# EAGLE board cdciom8print (EAGLE 7.7.0)
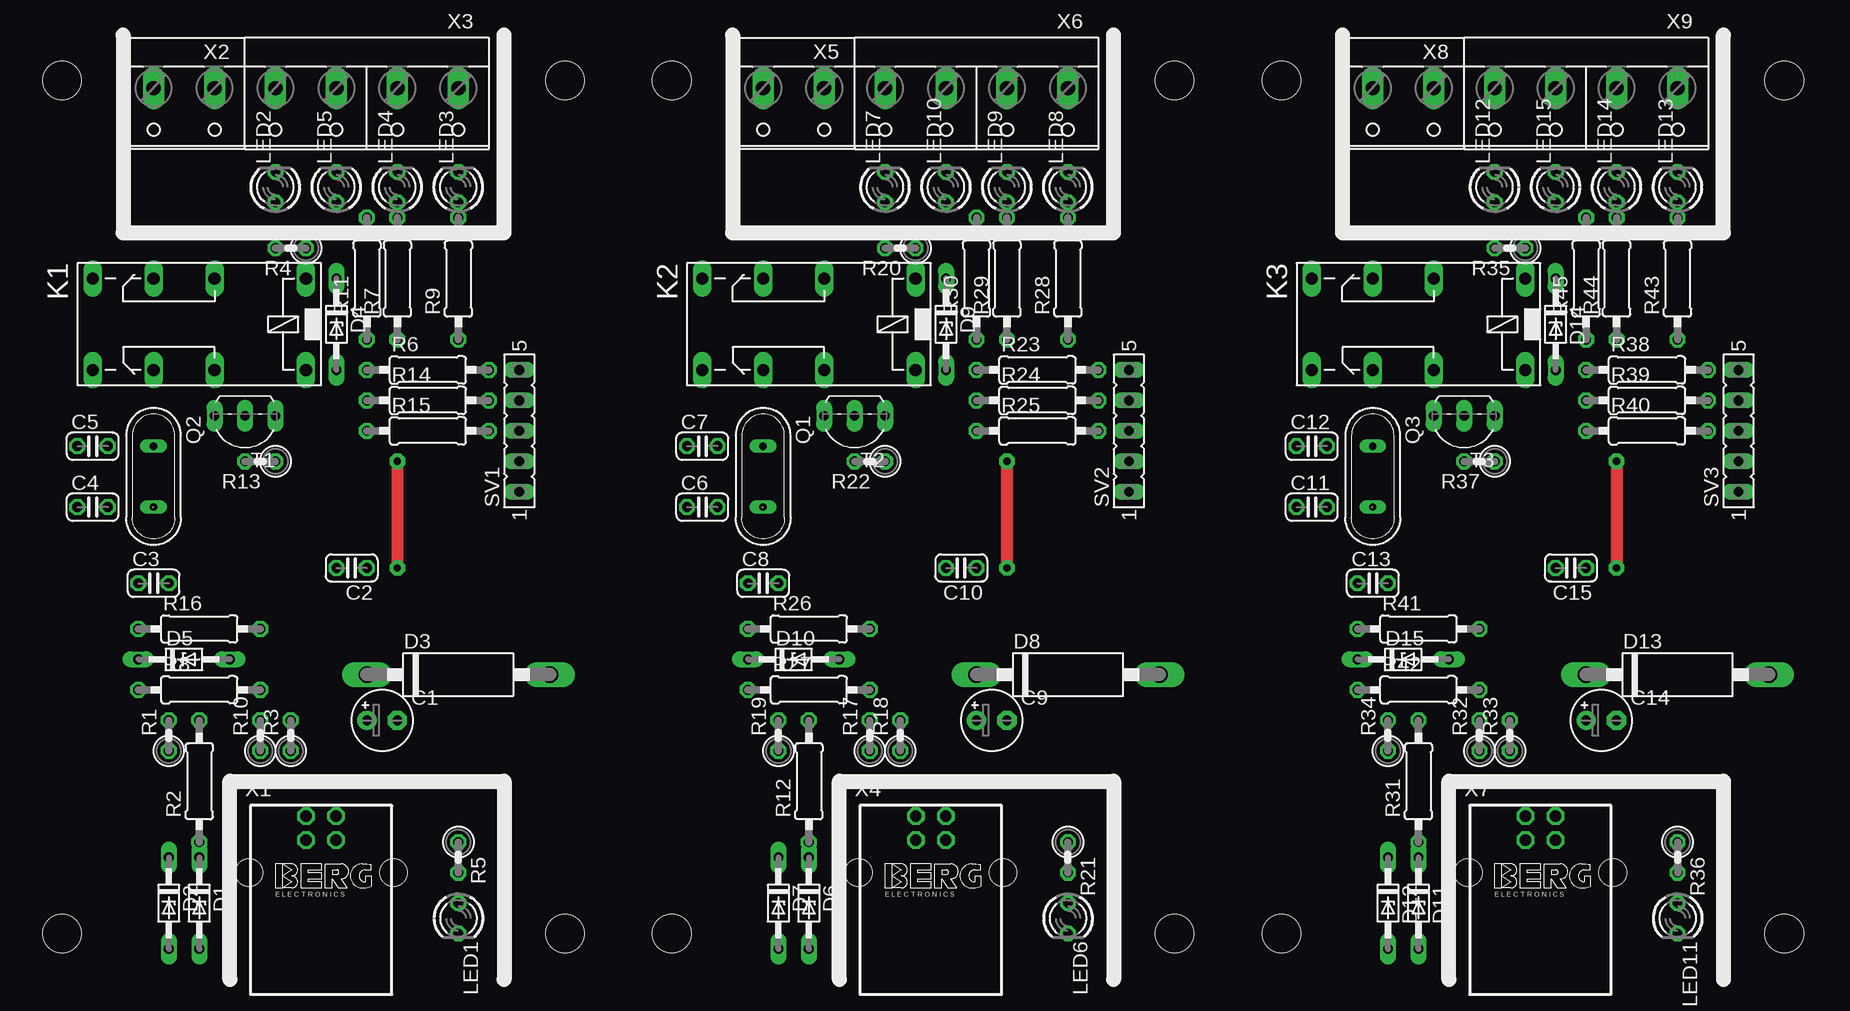
[diagram p0: board, top side]
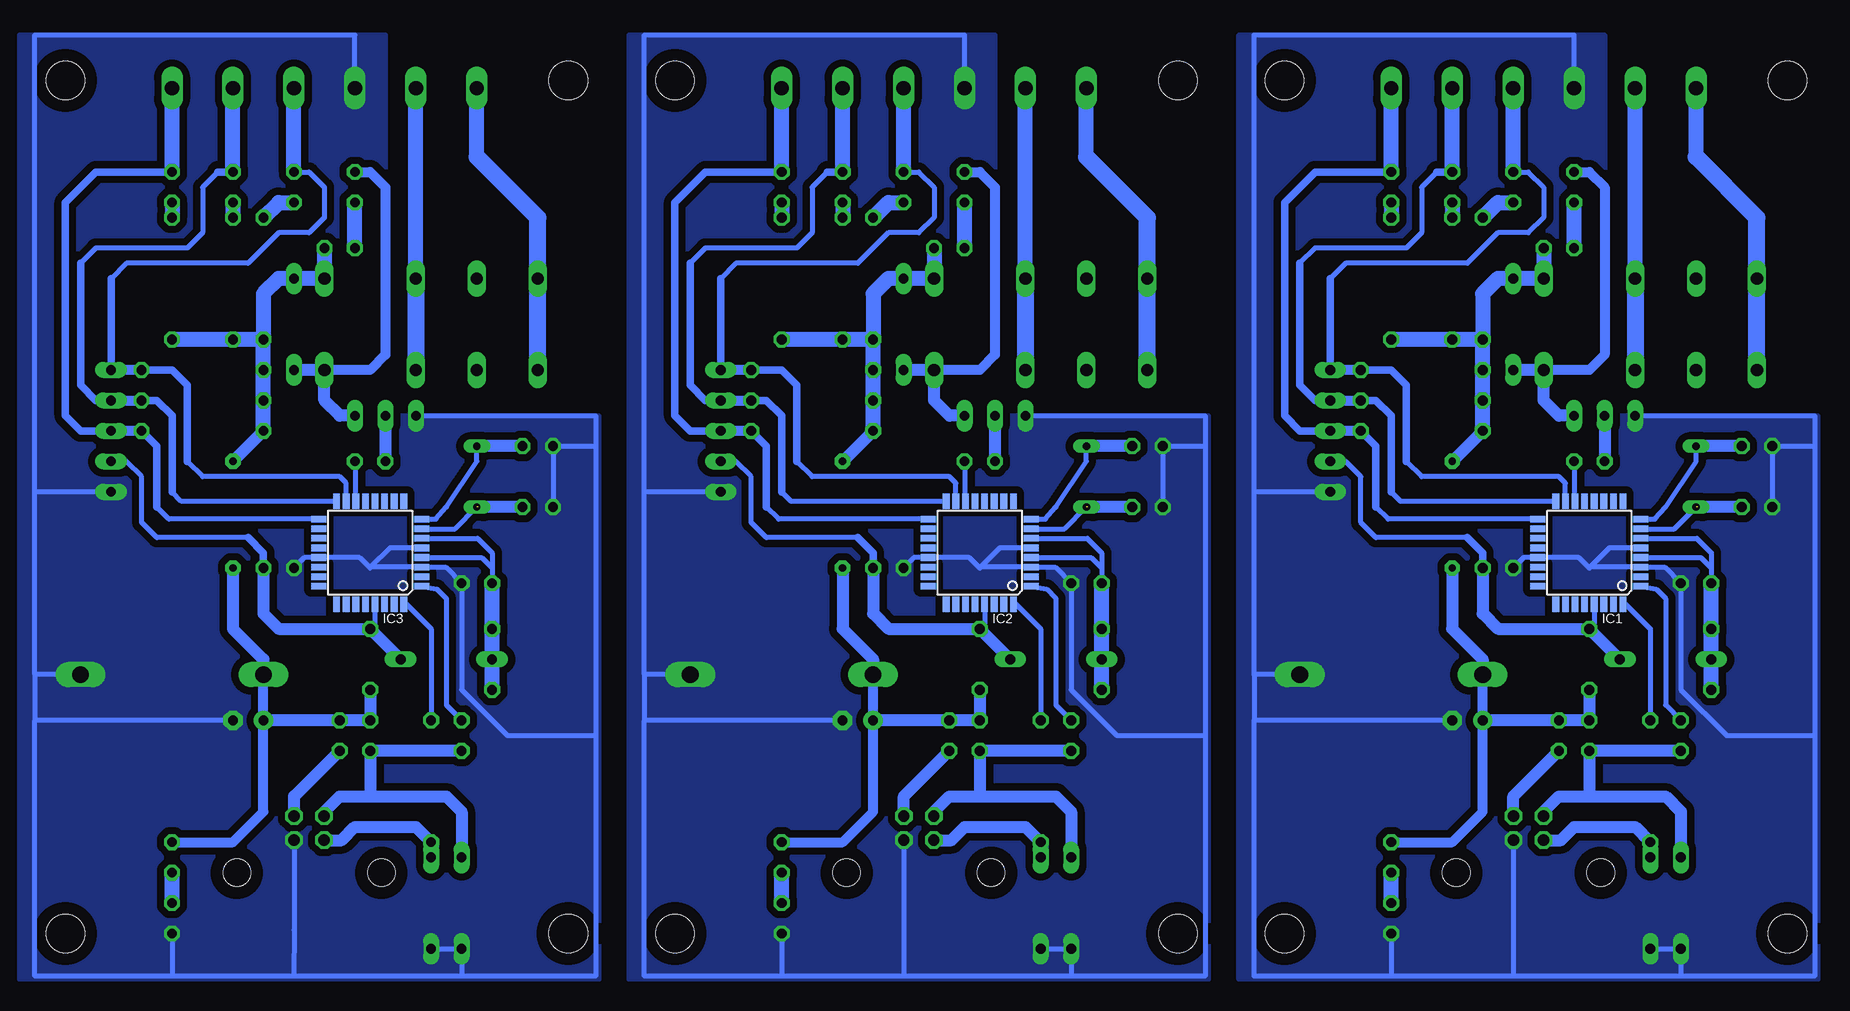
[diagram p1: board, bottom side, seen from below]

No outline drawn. Coordinates in mm, seen from the top.
Copper layers (1*16): Top 0.035mm / dielectric 1.5mm / Bottom 0.035mm
Design rules "default": minimum track width 10mil, minimum drill 24mil, track to track 8mil, track to pad 8mil, pad to pad 8mil, via to via 8mil, smd to smd 8mil, copper to edge 40mil, drill to drill 8mil, minimum pad ring 10mil, minimum via ring 8mil, stop-mask expansion 4mil, vias tented up to drill 0mil, thermal gap 10mil
Holes 3.2 mm at 44.45,3.81 2.54,3.81 2.54,74.93 44.45,74.93 95.25,3.81 53.34,3.81 53.34,74.93 95.25,74.93 146.05,3.81 104.14,3.81 104.14,74.93 146.05,74.93

## Footprints (pad centres in the part's own frame; a part is rotated, then mirrored left to right if it is on the bottom)
E2,5-5 = drill 0.813 pad 1.6: + -1.27,0 | drill 0.813 pad 1.6 octagon: - 1.27,0
C025-024X044 = drill 0.813 octagon: 1 -1.27,0; 2 1.27,0
DO34Z7 = drill 0.813 long: A 3.81,0; C -3.81,0
C1702-15 = drill 1.397 long: A 7.62,0; C -7.62,0
TQFP32-08 = smd 1.27 x 0.559: 1 -4.293,2.8; 2 -4.293,2; 3 -4.293,1.2; 4 -4.293,0.4; 5 -4.293,-0.4; 6 -4.293,-1.2; 7 -4.293,-2; 8 -4.293,-2.8; 17 4.293,-2.8; 18 4.293,-2; 19 4.293,-1.2; 20 4.293,-0.4; 21 4.293,0.4; 22 4.293,1.2; 23 4.293,2; 24 4.293,2.8 | smd 0.559 x 1.27: 9 -2.8,-4.293; 10 -2,-4.293; 11 -1.2,-4.293; 12 -0.4,-4.293; 13 0.4,-4.293; 14 1.2,-4.293; 15 2,-4.293; 16 2.8,-4.293; 25 2.8,4.293; 26 2,4.293; 27 1.2,4.293; 28 0.4,4.293; 29 -0.4,4.293; 30 -1.2,4.293; 31 -2,4.293; 32 -2.8,4.293
351 = drill 1.016 long: 1 -3.81,-3.81; 16 -3.81,3.81; O1 8.89,-3.81; O2 8.89,3.81; P1 3.81,-3.81; P2 3.81,3.81; S1 13.97,-3.81; S2 13.97,3.81
LED3MM = drill 0.813 octagon: A -1.27,0; K 1.27,0
QS = drill 0.61 long: 1 -2.54,0; 2 2.54,0
0207/2V = drill 0.813 octagon: 1 -1.27,0; 2 1.27,0
0207/10 = drill 0.813 octagon: 1 -5.08,0; 2 5.08,0
FE05-1 = drill 0.813 long: 1 -5.08,0; 2 -2.54,0; 3 0,0; 4 2.54,0; 5 5.08,0
TO92-CBE = drill 0.813 long: B 0,0; C -2.54,0; E 2.54,0
PN61729 = drill 0.95 octagon: 1 1.25,4.71; 2 -1.25,4.71; 3 -1.25,2.71; 4 1.25,2.71 | hole 2.3: -6.02,0; 6.02,0
W237-132 = drill 1.194 long: 1 -2.54,-0.635; 2 2.54,-0.635
W237-4P = drill 1.194 long: 1 -7.62,-0.635; 2 -2.54,-0.635; 3 2.54,-0.635; 4 7.62,-0.635

## Placement (x,y rotation side)
C1  4u7  [E2,5-5]  29.21,21.59 0 top
C2  100n  [C025-024X044]  26.67,34.29 180 top
C3  100n  [C025-024X044]  10.16,33.02 0 top
C4  22p  [C025-024X044]  5.08,39.37 0 top
C5  22p  [C025-024X044]  5.08,44.45 0 top
C6  22p  [C025-024X044]  55.88,39.37 0 top
C7  22p  [C025-024X044]  55.88,44.45 0 top
C8  100n  [C025-024X044]  60.96,33.02 0 top
C9  4u7  [E2,5-5]  80.01,21.59 0 top
C10  100n  [C025-024X044]  77.47,34.29 180 top
C11  22p  [C025-024X044]  106.68,39.37 0 top
C12  22p  [C025-024X044]  106.68,44.45 0 top
C13  100n  [C025-024X044]  111.76,33.02 0 top
C14  4u7  [E2,5-5]  130.81,21.59 0 top
C15  100n  [C025-024X044]  128.27,34.29 180 top
D1  3V6  [DO34Z7]  13.97,6.35 270 top
D2  3V6  [DO34Z7]  11.43,6.35 270 top
D3  P6KEXXA  [C1702-15]  35.56,25.4 0 top
D4  3V6  [DO34Z7]  25.4,54.61 270 top
D5  3V6  [DO34Z7]  12.7,26.67 0 top
D6  3V6  [DO34Z7]  64.77,6.35 270 top
D7  3V6  [DO34Z7]  62.23,6.35 270 top
D8  P6KEXXA  [C1702-15]  86.36,25.4 0 top
D9  3V6  [DO34Z7]  76.2,54.61 270 top
D10  3V6  [DO34Z7]  63.5,26.67 0 top
D11  3V6  [DO34Z7]  115.57,6.35 270 top
D12  3V6  [DO34Z7]  113.03,6.35 270 top
D13  P6KEXXA  [C1702-15]  137.16,25.4 0 top
D14  3V6  [DO34Z7]  127,54.61 270 top
D15  3V6  [DO34Z7]  114.3,26.67 0 top
IC1  MEGA8-AI  [TQFP32-08]  19.05,35.56 180 bottom
IC2  MEGA8-AI  [TQFP32-08]  69.85,35.56 180 bottom
IC3  MEGA8-AI  [TQFP32-08]  120.65,35.56 180 bottom
K1  351  [351]  19.05,54.61 180 top
K2  351  [351]  69.85,54.61 180 top
K3  351  [351]  120.65,54.61 180 top
LED1  green  [LED3MM]  35.56,5.08 270 top
LED2  red  [LED3MM]  20.32,66.04 90 top
LED3  green  [LED3MM]  35.56,66.04 90 top
LED4  green  [LED3MM]  30.48,66.04 90 top
LED5  green  [LED3MM]  25.4,66.04 90 top
LED6  green  [LED3MM]  86.36,5.08 270 top
LED7  red  [LED3MM]  71.12,66.04 90 top
LED8  green  [LED3MM]  86.36,66.04 90 top
LED9  green  [LED3MM]  81.28,66.04 90 top
LED10  green  [LED3MM]  76.2,66.04 90 top
LED11  green  [LED3MM]  137.16,5.08 270 top
LED12  red  [LED3MM]  121.92,66.04 90 top
LED13  green  [LED3MM]  137.16,66.04 90 top
LED14  green  [LED3MM]  132.08,66.04 90 top
LED15  green  [LED3MM]  127,66.04 90 top
Q1  [QS]  60.96,41.91 270 top
Q2  [QS]  10.16,41.91 270 top
Q3  [QS]  111.76,41.91 270 top
R1  2k2  [0207/2V]  11.43,20.32 90 top
R2  68  [0207/10]  13.97,16.51 90 top
R3  1R  [0207/2V]  21.59,20.32 90 top
R4  2k2  [0207/2V]  21.59,60.96 180 top
R5  2k2  [0207/2V]  35.56,10.16 270 top
R6  68  [0207/10]  33.02,50.8 0 top
R7  68  [0207/10]  30.48,58.42 90 top
R8  68  [0207/10]  13.97,24.13 0 top
R9  68  [0207/10]  35.56,58.42 90 top
R10  2k2  [0207/2V]  19.05,20.32 90 top
R11  68  [0207/10]  27.94,58.42 90 top
R12  68  [0207/10]  64.77,16.51 90 top
R13  2k2  [0207/2V]  19.05,43.18 180 top
R14  68  [0207/10]  33.02,48.26 0 top
R15  68  [0207/10]  33.02,45.72 0 top
R16  68  [0207/10]  13.97,29.21 0 top
R17  2k2  [0207/2V]  69.85,20.32 90 top
R18  1R  [0207/2V]  72.39,20.32 90 top
R19  2k2  [0207/2V]  62.23,20.32 90 top
R20  2k2  [0207/2V]  72.39,60.96 180 top
R21  2k2  [0207/2V]  86.36,10.16 270 top
R22  2k2  [0207/2V]  69.85,43.18 180 top
R23  68  [0207/10]  83.82,50.8 0 top
R24  68  [0207/10]  83.82,48.26 0 top
R25  68  [0207/10]  83.82,45.72 0 top
R26  68  [0207/10]  64.77,29.21 0 top
R27  68  [0207/10]  64.77,24.13 0 top
R28  68  [0207/10]  86.36,58.42 90 top
R29  68  [0207/10]  81.28,58.42 90 top
R30  68  [0207/10]  78.74,58.42 90 top
R31  68  [0207/10]  115.57,16.51 90 top
R32  2k2  [0207/2V]  120.65,20.32 90 top
R33  1R  [0207/2V]  123.19,20.32 90 top
R34  2k2  [0207/2V]  113.03,20.32 90 top
R35  2k2  [0207/2V]  123.19,60.96 180 top
R36  2k2  [0207/2V]  137.16,10.16 270 top
R37  2k2  [0207/2V]  120.65,43.18 180 top
R38  68  [0207/10]  134.62,50.8 0 top
R39  68  [0207/10]  134.62,48.26 0 top
R40  68  [0207/10]  134.62,45.72 0 top
R41  68  [0207/10]  115.57,29.21 0 top
R42  68  [0207/10]  115.57,24.13 0 top
R43  68  [0207/10]  137.16,58.42 90 top
R44  68  [0207/10]  132.08,58.42 90 top
R45  68  [0207/10]  129.54,58.42 90 top
SV1  [FE05-1]  40.64,45.72 90 top
SV2  [FE05-1]  91.44,45.72 90 top
SV3  [FE05-1]  142.24,45.72 90 top
T1  [TO92-CBE]  17.78,46.99 180 top
T2  [TO92-CBE]  68.58,46.99 180 top
T3  [TO92-CBE]  119.38,46.99 180 top
X1  [PN61729]  24.13,8.89 0 top
X2  [W237-132]  12.7,73.66 180 top
X3  [W237-4P]  27.94,73.66 180 top
X4  [PN61729]  74.93,8.89 0 top
X5  [W237-132]  63.5,73.66 180 top
X6  [W237-4P]  78.74,73.66 180 top
X7  [PN61729]  125.73,8.89 0 top
X8  [W237-132]  114.3,73.66 180 top
X9  [W237-4P]  129.54,73.66 180 top

## Library data of the parts
C1-C15 R1-R45 = rcl
D1-D15 = diode
IC1-IC3 = atmel; MPN: ATMEGA8-16AU; OC_FARNELL: 9171371; OC_NEWARK: 73M8863
K1-K3 = relay; OC_FARNELL: unknown; OC_NEWARK: unknown
LED1-LED15 = led
Q1-Q3 = special
SV1-SV3 = con-lsta; OC_FARNELL: unknown; OC_NEWARK: unknown
T1-T3 = transistor
X1 X4 X7 = con-berg
X2 X3 X5 X6 X8 X9 = con-wago-508; OC_FARNELL: unknown; OC_NEWARK: unknown

## Nets
+5V: C3.1 D5.C IC1.4 IC1.6 R8.1 R16.1
+5V1: C8.1 D10.C IC2.4 IC2.6 R26.1 R27.1
+5V2: C13.1 D15.C IC3.4 IC3.6 R41.1 R42.1
AVCC: IC1.18
AVCC1: IC2.18
AVCC2: IC3.18
GND: C1.- C2.2 C3.2 C4.1 C5.1 D1.A D2.A D3.A IC1.3 IC1.5 IC1.21 LED1.K SV1.1 T1.E X1.4 X3.4
GND1: C6.1 C7.1 C8.2 C9.- C10.2 D6.A D7.A D8.A IC2.3 IC2.5 IC2.21 LED6.K SV2.1 T2.E X4.4 X6.4
GND2: C11.1 C12.1 C13.2 C14.- C15.2 D11.A D12.A D13.A IC3.3 IC3.5 IC3.21 LED11.K SV3.1 T3.E X7.4 X9.4
N$1: C2.1 D5.A IC1.29 R16.2 SV1.2
N$2: R13.2 T1.B
N$3: IC1.14 R13.1
N$4: D4.A K1.16 LED2.K T1.C
N$5: D2.C R1.1 R10.1 X1.2
N$6: K1.S1 K1.S2 X2.2
N$7: IC1.32 R2.2
N$8: D1.C R2.1 X1.3
N$9: LED2.A R4.2
N$10: K1.P1 K1.P2 X2.1
N$11: R3.1 X1.1
N$12: LED1.A R5.2
N$13: LED3.A R9.2
N$14: LED4.A R7.2
N$15: LED5.A R11.2
N$16: IC1.1 R1.2
N$17: IC1.17 LED3.K R15.2 SV1.3 X3.1
N$18: IC1.16 LED4.K R14.2 SV1.4 X3.2
N$19: IC1.15 LED5.K R6.2 SV1.5 X3.3
N$20: D7.C R17.1 R19.1 X4.2
N$21: D6.C R12.1 X4.3
N$22: C4.2 IC1.7 Q2.2
N$23: C5.2 IC1.8 Q2.1
N$24: C6.2 IC2.7 Q1.2
N$25: C7.2 IC2.8 Q1.1
N$26: IC2.32 R12.2
N$27: C10.1 D10.A IC2.29 R26.2 SV2.2
N$28: IC2.1 R19.2
N$29: D9.A K2.16 LED7.K T2.C
N$30: K2.S1 K2.S2 X5.2
N$31: K2.P1 K2.P2 X5.1
N$32: R18.1 X4.1
N$33: LED7.A R20.2
N$34: LED6.A R21.2
N$35: LED9.A R29.2
N$36: LED10.A R30.2
N$37: R22.2 T2.B
N$38: IC2.17 LED8.K R25.2 SV2.3 X6.1
N$39: IC2.16 LED9.K R24.2 SV2.4 X6.2
N$40: IC2.15 LED10.K R23.2 SV2.5 X6.3
N$41: IC2.14 R22.1
N$42: LED8.A R28.2
N$43: D12.C R32.1 R34.1 X7.2
N$44: D11.C R31.1 X7.3
N$45: C11.2 IC3.7 Q3.2
N$46: C12.2 IC3.8 Q3.1
N$47: IC3.32 R31.2
N$48: C15.1 D15.A IC3.29 R41.2 SV3.2
N$49: IC3.1 R34.2
N$50: D14.A K3.16 LED12.K T3.C
N$51: K3.S1 K3.S2 X8.2
N$52: K3.P1 K3.P2 X8.1
N$53: R33.1 X7.1
N$54: LED12.A R35.2
N$55: LED11.A R36.2
N$56: LED14.A R44.2
N$57: LED15.A R45.2
N$58: R37.2 T3.B
N$59: IC3.17 LED13.K R40.2 SV3.3 X9.1
N$60: IC3.16 LED14.K R39.2 SV3.4 X9.2
N$61: IC3.15 LED15.K R38.2 SV3.5 X9.3
N$62: IC3.14 R37.1
N$63: LED13.A R43.2
VCC: C1.+ D3.C D4.C K1.1 R3.2 R4.1 R5.1 R6.1 R7.1 R8.2 R9.1 R10.2 R11.1 R14.1 R15.1
VCC1: C9.+ D8.C D9.C K2.1 R17.2 R18.2 R20.1 R21.1 R23.1 R24.1 R25.1 R27.2 R28.1 R29.1 R30.1
VCC2: C14.+ D13.C D14.C K3.1 R32.2 R33.2 R35.1 R36.1 R38.1 R39.1 R40.1 R42.2 R43.1 R44.1 R45.1

## Tracks (layer width: path | path; a pad name or v marks a point on that pad's centre or on a via)
+5V
  Bottom 0.406: IC1.6 10.09,36.76 8.89,35.56 8.89,34.29 | 8.89,34.29 C3.1 | IC1.4 9.76,35.16 8.89,34.29
  Bottom 1.27: R8.1 D5.C R16.1 C3.1
+5V1
  Bottom 0.406: IC2.6 60.89,36.76 59.69,35.56 59.69,34.29 | 59.69,34.29 C8.1 | IC2.4 60.56,35.16 59.69,34.29
  Bottom 1.27: R27.1 D10.C R26.1 C8.1
+5V2
  Bottom 0.406: IC3.6 111.69,36.76 110.49,35.56 110.49,34.29 | 110.49,34.29 C13.1 | IC3.4 111.36,35.16 110.49,34.29
  Bottom 1.27: R42.1 D15.C R41.1 C13.1
GND
  Bottom 0.406: 46.99,21.59 46.99,0.27 35.56,0.27 | 46.99,25.4 46.99,40.64 | 46.99,40.64 46.99,78.74 20.32,78.74 X3.4 | 0.27,44.45 0.27,46.99 T1.E | 0.27,44.45 0.27,20.32 | 0.27,20.32 0.27,0.27 11.43,0.27 | 11.43,0.27 25.4,0.27 | 25.4,0.27 35.56,0.27 | C4.1 C5.1 0.27,44.45 | D1.A D2.A 11.43,0.27 | X1.4 25.38,4.1 25.4,0.27 | LED1.K 35.56,0.27 | C1.- 46.99,21.59 | D3.A 46.99,25.4 | 46.99,25.4 46.99,21.59 | SV1.1 46.99,40.64 | 18.98,34.36 IC1.3 12.77,34.36 C3.2 11.43,24.13 7.62,20.32 0.27,20.32 | 18.98,34.36 19.05,34.29 19.92,35.16 IC1.21 24.53,35.16 C2.2 | IC1.5 17.38,35.96 18.98,34.36
  pour Bottom (isolate 0.61, no thermals): 0,46.99 0,0 48.26,0 48.26,78.74 17.78,78.74 17.78,46.99
GND1
  Bottom 0.406: 97.79,21.59 97.79,0.27 86.36,0.27 | 97.79,25.4 97.79,40.64 | 97.79,40.64 97.79,78.74 71.12,78.74 X6.4 | 51.07,44.45 51.07,46.99 T2.E | 51.07,44.45 51.07,20.32 | 51.07,20.32 51.07,0.27 62.23,0.27 | 62.23,0.27 76.2,0.27 | 76.2,0.27 86.36,0.27 | C6.1 C7.1 51.07,44.45 | D6.A D7.A 62.23,0.27 | X4.4 76.18,4.1 76.2,0.27 | LED6.K 86.36,0.27 | C9.- 97.79,21.59 | D8.A 97.79,25.4 | 97.79,25.4 97.79,21.59 | SV2.1 97.79,40.64 | 69.78,34.36 IC2.3 63.57,34.36 C8.2 62.23,24.13 58.42,20.32 51.07,20.32 | 69.78,34.36 69.85,34.29 70.72,35.16 IC2.21 75.33,35.16 C10.2 | IC2.5 68.18,35.96 69.78,34.36
  pour Bottom (isolate 0.61, no thermals): 50.8,46.99 50.8,0 99.06,0 99.06,78.74 68.58,78.74 68.58,46.99
GND2
  Bottom 0.406: 148.59,21.59 148.59,0.27 137.16,0.27 | 148.59,25.4 148.59,40.64 | 148.59,40.64 148.59,78.74 121.92,78.74 X9.4 | 101.87,44.45 101.87,46.99 T3.E | 101.87,44.45 101.87,20.32 | 101.87,20.32 101.87,0.27 113.03,0.27 | 113.03,0.27 127,0.27 | 127,0.27 137.16,0.27 | C11.1 C12.1 101.87,44.45 | D11.A D12.A 113.03,0.27 | X7.4 126.98,4.1 127,0.27 | LED11.K 137.16,0.27 | C14.- 148.59,21.59 | D13.A 148.59,25.4 | 148.59,25.4 148.59,21.59 | SV3.1 148.59,40.64 | 120.58,34.36 IC3.3 114.37,34.36 C13.2 113.03,24.13 109.22,20.32 101.87,20.32 | 120.58,34.36 120.65,34.29 121.52,35.16 IC3.21 126.13,35.16 C15.2 | IC3.5 118.98,35.96 120.58,34.36
  pour Bottom (isolate 0.61, no thermals): 101.6,46.99 101.6,0 149.86,0 149.86,78.74 119.38,78.74 119.38,46.99
N$1
  Bottom 0.406: IC1.29 18.65,29.61 R16.2 | 29.21,36.83 36.83,36.83 38.1,38.1 38.1,41.91 39.37,43.18 SV1.2
  Bottom 0.61: C2.1 27.94,35.56 29.21,36.83
  Bottom 1.016: D5.A R16.2 26.67,29.21 27.94,30.48 C2.1
N$2
  Bottom 1.016: T1.B R13.2
N$3
  Bottom 0.406: IC1.14 20.25,43.25 R13.1
N$4
  Bottom 0.813: LED2.K 19.05,67.31 17.78,66.04 17.78,52.07 19.05,50.8 K1.16
  Bottom 1.016: T1.C 21.59,46.99 22.86,48.26 K1.16 D4.A
N$5
  Bottom 1.016: X1.2 22.88,13.95 21.59,15.24 19.05,15.24 | 19.05,15.24 12.7,15.24 11.43,13.97 D2.C | R1.1 R10.1 19.05,15.24
N$6
  Bottom 1.27: 10.16,68.58 X2.2
  Bottom 1.422: K1.S2 K1.S1 5.08,63.5 10.16,68.58
N$7
  Bottom 0.406: R2.2 13.97,29.21 16.25,31.49 IC1.32
N$8
  Bottom 1.016: X1.3 21.42,11.6 20.32,12.7 15.24,12.7 R2.1
  Bottom 1.27: R2.1 D1.C
N$9
  Bottom 1.27: R4.2 LED2.A
N$10
  Bottom 1.27: K1.P1 X2.1 15.24,74.93
  Bottom 1.422: K1.P1 K1.P2
N$11
  Bottom 1.016: X1.1 25.38,15.26 R3.1
N$12
  Bottom 1.27: LED1.A R5.2
N$13
  Bottom 1.27: LED3.A R9.2
N$14
  Bottom 1.27: LED4.A R7.2
N$15
  Bottom 1.27: R11.2 26.67,64.77 LED5.A
N$16
  Bottom 0.406: IC1.1 13.49,32.54 12.7,31.75 12.7,22.86 R1.2
N$17
  Bottom 0.406: IC1.17 35.82,38.36 36.83,39.37
  Bottom 0.61: LED3.K 41.91,67.31 44.45,64.77 44.45,46.99 43.18,45.72 SV1.3 | 36.83,39.37 36.83,44.45 R15.2
  Bottom 0.813: R15.2 SV1.3
  Bottom 1.27: LED3.K X3.1
N$18
  Bottom 0.406: 31.75,67.31 33.02,66.04 33.02,62.23 34.29,60.96 41.91,60.96 43.18,59.69 | IC1.16 34.77,39.85 35.56,40.64
  Bottom 0.61: LED4.K 31.75,67.31 | 43.18,59.69 43.18,49.53 41.91,48.26 SV1.4 | R14.2 36.83,48.26 35.56,46.99 35.56,40.64
  Bottom 0.813: SV1.4 R14.2
  Bottom 1.27: LED4.K X3.2
N$19
  Bottom 0.406: LED5.K 24.13,67.31 22.86,66.04 22.86,63.5 24.13,62.23 26.67,62.23 29.21,59.69 39.37,59.69 40.64,58.42 | IC1.15 21.05,41.37 21.59,41.91 33.02,41.91 34.29,43.18
  Bottom 0.61: 40.64,58.42 SV1.5 | 34.29,43.18 34.29,49.53 35.56,50.8 R6.2
  Bottom 0.813: R6.2 SV1.5
  Bottom 1.27: LED5.K X3.3
N$20
  Bottom 1.016: X4.2 73.68,13.95 72.39,15.24 69.85,15.24 | 69.85,15.24 63.5,15.24 62.23,13.97 D7.C | R19.1 R17.1 69.85,15.24
N$21
  Bottom 1.016: X4.3 72.22,11.6 71.12,12.7 66.04,12.7 R12.1
  Bottom 1.27: R12.1 D6.C
N$22  (1 unrouted)
  Bottom 0.406: IC1.7 11.97,37.56 Q2.2
  Bottom 1.016: C4.2 10.03,39.37
N$23
  Bottom 0.406: IC1.8 13.58,38.36 12.7,39.37 10.16,43.18 Q2.1 10.03,44.45
  Bottom 1.016: C5.2 10.03,44.45
N$24  (1 unrouted)
  Bottom 0.406: IC2.7 62.77,37.56 Q1.2
  Bottom 1.016: C6.2 60.83,39.37
N$25
  Bottom 0.406: IC2.8 64.38,38.36 63.5,39.37 60.96,43.18 Q1.1 60.83,44.45
  Bottom 1.016: C7.2 60.83,44.45
N$26
  Bottom 0.406: R12.2 64.77,29.21 67.05,31.49 IC2.32
N$27
  Bottom 0.406: IC2.29 69.45,29.61 R26.2 | 80.01,36.83 87.63,36.83 88.9,38.1 88.9,41.91 90.17,43.18 SV2.2
  Bottom 0.61: C10.1 78.74,35.56 80.01,36.83
  Bottom 1.016: D10.A R26.2 77.47,29.21 78.74,30.48 C10.1
N$28
  Bottom 0.406: IC2.1 64.29,32.54 63.5,31.75 63.5,22.86 R19.2
N$29
  Bottom 0.813: LED7.K 69.85,67.31 68.58,66.04 68.58,52.07 69.85,50.8 K2.16
  Bottom 1.016: T2.C 72.39,46.99 73.66,48.26 K2.16 D9.A
N$30
  Bottom 1.27: 60.96,68.58 X5.2
  Bottom 1.422: K2.S2 K2.S1 55.88,63.5 60.96,68.58
N$31
  Bottom 1.27: K2.P1 X5.1 66.04,74.93
  Bottom 1.422: K2.P1 K2.P2
N$32
  Bottom 1.016: X4.1 76.18,15.26 R18.1
N$33
  Bottom 1.27: R20.2 LED7.A
N$34
  Bottom 1.27: LED6.A R21.2
N$35
  Bottom 1.27: LED9.A R29.2
N$36
  Bottom 1.27: R30.2 77.47,64.77 LED10.A
N$37
  Bottom 1.016: T2.B R22.2
N$38
  Bottom 0.406: IC2.17 86.62,38.36 87.63,39.37
  Bottom 0.61: LED8.K 92.71,67.31 95.25,64.77 95.25,46.99 93.98,45.72 SV2.3 | 87.63,39.37 87.63,44.45 R25.2
  Bottom 0.813: R25.2 SV2.3
  Bottom 1.27: LED8.K X6.1
N$39
  Bottom 0.406: 82.55,67.31 83.82,66.04 83.82,62.23 85.09,60.96 92.71,60.96 93.98,59.69 | IC2.16 85.57,39.85 86.36,40.64
  Bottom 0.61: LED9.K 82.55,67.31 | 93.98,59.69 93.98,49.53 92.71,48.26 SV2.4 | R24.2 87.63,48.26 86.36,46.99 86.36,40.64
  Bottom 0.813: SV2.4 R24.2
  Bottom 1.27: LED9.K X6.2
N$40
  Bottom 0.406: LED10.K 74.93,67.31 73.66,66.04 73.66,63.5 74.93,62.23 77.47,62.23 80.01,59.69 90.17,59.69 91.44,58.42 | IC2.15 71.85,41.37 72.39,41.91 83.82,41.91 85.09,43.18
  Bottom 0.61: 91.44,58.42 SV2.5 | 85.09,43.18 85.09,49.53 86.36,50.8 R23.2
  Bottom 0.813: R23.2 SV2.5
  Bottom 1.27: LED10.K X6.3
N$41
  Bottom 0.406: IC2.14 71.05,43.25 R22.1
N$42
  Bottom 1.27: LED8.A R28.2
N$43
  Bottom 1.016: X7.2 124.48,13.95 123.19,15.24 120.65,15.24 | 120.65,15.24 114.3,15.24 113.03,13.97 D12.C | R34.1 R32.1 120.65,15.24
N$44
  Bottom 1.016: X7.3 123.02,11.6 121.92,12.7 116.84,12.7 R31.1
  Bottom 1.27: R31.1 D11.C
N$45  (1 unrouted)
  Bottom 0.406: IC3.7 113.57,37.56 Q3.2
  Bottom 1.016: C11.2 111.63,39.37
N$46
  Bottom 0.406: IC3.8 115.18,38.36 114.3,39.37 111.76,43.18 Q3.1 111.63,44.45
  Bottom 1.016: C12.2 111.63,44.45
N$47
  Bottom 0.406: R31.2 115.57,29.21 117.85,31.49 IC3.32
N$48
  Bottom 0.406: IC3.29 120.25,29.61 R41.2 | 130.81,36.83 138.43,36.83 139.7,38.1 139.7,41.91 140.97,43.18 SV3.2
  Bottom 0.61: C15.1 129.54,35.56 130.81,36.83
  Bottom 1.016: D15.A R41.2 128.27,29.21 129.54,30.48 C15.1
N$49
  Bottom 0.406: IC3.1 115.09,32.54 114.3,31.75 114.3,22.86 R34.2
N$50
  Bottom 0.813: LED12.K 120.65,67.31 119.38,66.04 119.38,52.07 120.65,50.8 K3.16
  Bottom 1.016: T3.C 123.19,46.99 124.46,48.26 K3.16 D14.A
N$51
  Bottom 1.27: 111.76,68.58 X8.2
  Bottom 1.422: K3.S2 K3.S1 106.68,63.5 111.76,68.58
N$52
  Bottom 1.27: K3.P1 X8.1 116.84,74.93
  Bottom 1.422: K3.P1 K3.P2
N$53
  Bottom 1.016: X7.1 126.98,15.26 R33.1
N$54
  Bottom 1.27: R35.2 LED12.A
N$55
  Bottom 1.27: LED11.A R36.2
N$56
  Bottom 1.27: LED14.A R44.2
N$57
  Bottom 1.27: R45.2 128.27,64.77 LED15.A
N$58
  Bottom 1.016: T3.B R37.2
N$59
  Bottom 0.406: IC3.17 137.42,38.36 138.43,39.37
  Bottom 0.61: LED13.K 143.51,67.31 146.05,64.77 146.05,46.99 144.78,45.72 SV3.3 | 138.43,39.37 138.43,44.45 R40.2
  Bottom 0.813: R40.2 SV3.3
  Bottom 1.27: LED13.K X9.1
N$60
  Bottom 0.406: 133.35,67.31 134.62,66.04 134.62,62.23 135.89,60.96 143.51,60.96 144.78,59.69 | IC3.16 136.37,39.85 137.16,40.64
  Bottom 0.61: LED14.K 133.35,67.31 | 144.78,59.69 144.78,49.53 143.51,48.26 SV3.4 | R39.2 138.43,48.26 137.16,46.99 137.16,40.64
  Bottom 0.813: SV3.4 R39.2
  Bottom 1.27: LED14.K X9.2
N$61
  Bottom 0.406: LED15.K 125.73,67.31 124.46,66.04 124.46,63.5 125.73,62.23 128.27,62.23 130.81,59.69 140.97,59.69 142.24,58.42 | IC3.15 122.65,41.37 123.19,41.91 134.62,41.91 135.89,43.18
  Bottom 0.61: 142.24,58.42 SV3.5 | 135.89,43.18 135.89,49.53 137.16,50.8 R38.2
  Bottom 0.813: R38.2 SV3.5
  Bottom 1.27: LED15.K X9.3
N$62
  Bottom 0.406: IC3.14 121.85,43.25 R37.1
N$63
  Bottom 1.27: LED13.A R43.2
VCC  (via drill 0.6 pad 1.27)
  Top 1.016: v30.48,43.18 v30.48,34.29
  Bottom 0.813: D3.C C1.+ 27.94,13.97 30.48,11.43 R5.1
  Bottom 1.016: C1.+ R3.2 R10.2 R8.2 | R15.1 v30.48,43.18 | v30.48,34.29 30.48,29.21 27.94,26.67 D3.C
  Bottom 1.27: R15.1 R14.1 R6.1 R11.1 | R4.1 K1.1 D4.C 26.67,58.42 27.94,57.15 R11.1 | R11.1 R7.1 R9.1
VCC1  (via drill 0.6 pad 1.27)
  Top 1.016: v81.28,43.18 v81.28,34.29
  Bottom 0.813: D8.C C9.+ 78.74,13.97 81.28,11.43 R21.1
  Bottom 1.016: C9.+ R18.2 R17.2 R27.2 | R25.1 v81.28,43.18 | v81.28,34.29 81.28,29.21 78.74,26.67 D8.C
  Bottom 1.27: R25.1 R24.1 R23.1 R30.1 | R20.1 K2.1 D9.C 77.47,58.42 78.74,57.15 R30.1 | R30.1 R29.1 R28.1
VCC2  (via drill 0.6 pad 1.27)
  Top 1.016: v132.08,43.18 v132.08,34.29
  Bottom 0.813: D13.C C14.+ 129.54,13.97 132.08,11.43 R36.1
  Bottom 1.016: C14.+ R33.2 R32.2 R42.2 | R40.1 v132.08,43.18 | v132.08,34.29 132.08,29.21 129.54,26.67 D13.C
  Bottom 1.27: R40.1 R39.1 R38.1 R45.1 | R35.1 K3.1 D14.C 128.27,58.42 129.54,57.15 R45.1 | R45.1 R44.1 R43.1